# Altium PCB GY-G11.PCBDOC (part 2 of 7)
Units mm, origin at the board's own origin, x right, y up, seen from the top; angles counter-clockwise.
Board outline 170.4 x 114.15 mm, 2 copper layers (Top Layer, Bottom Layer); 364 components, 260 nets, 1285 pads, 753 vias.
Unrouted connection lines stored in the file: 2.
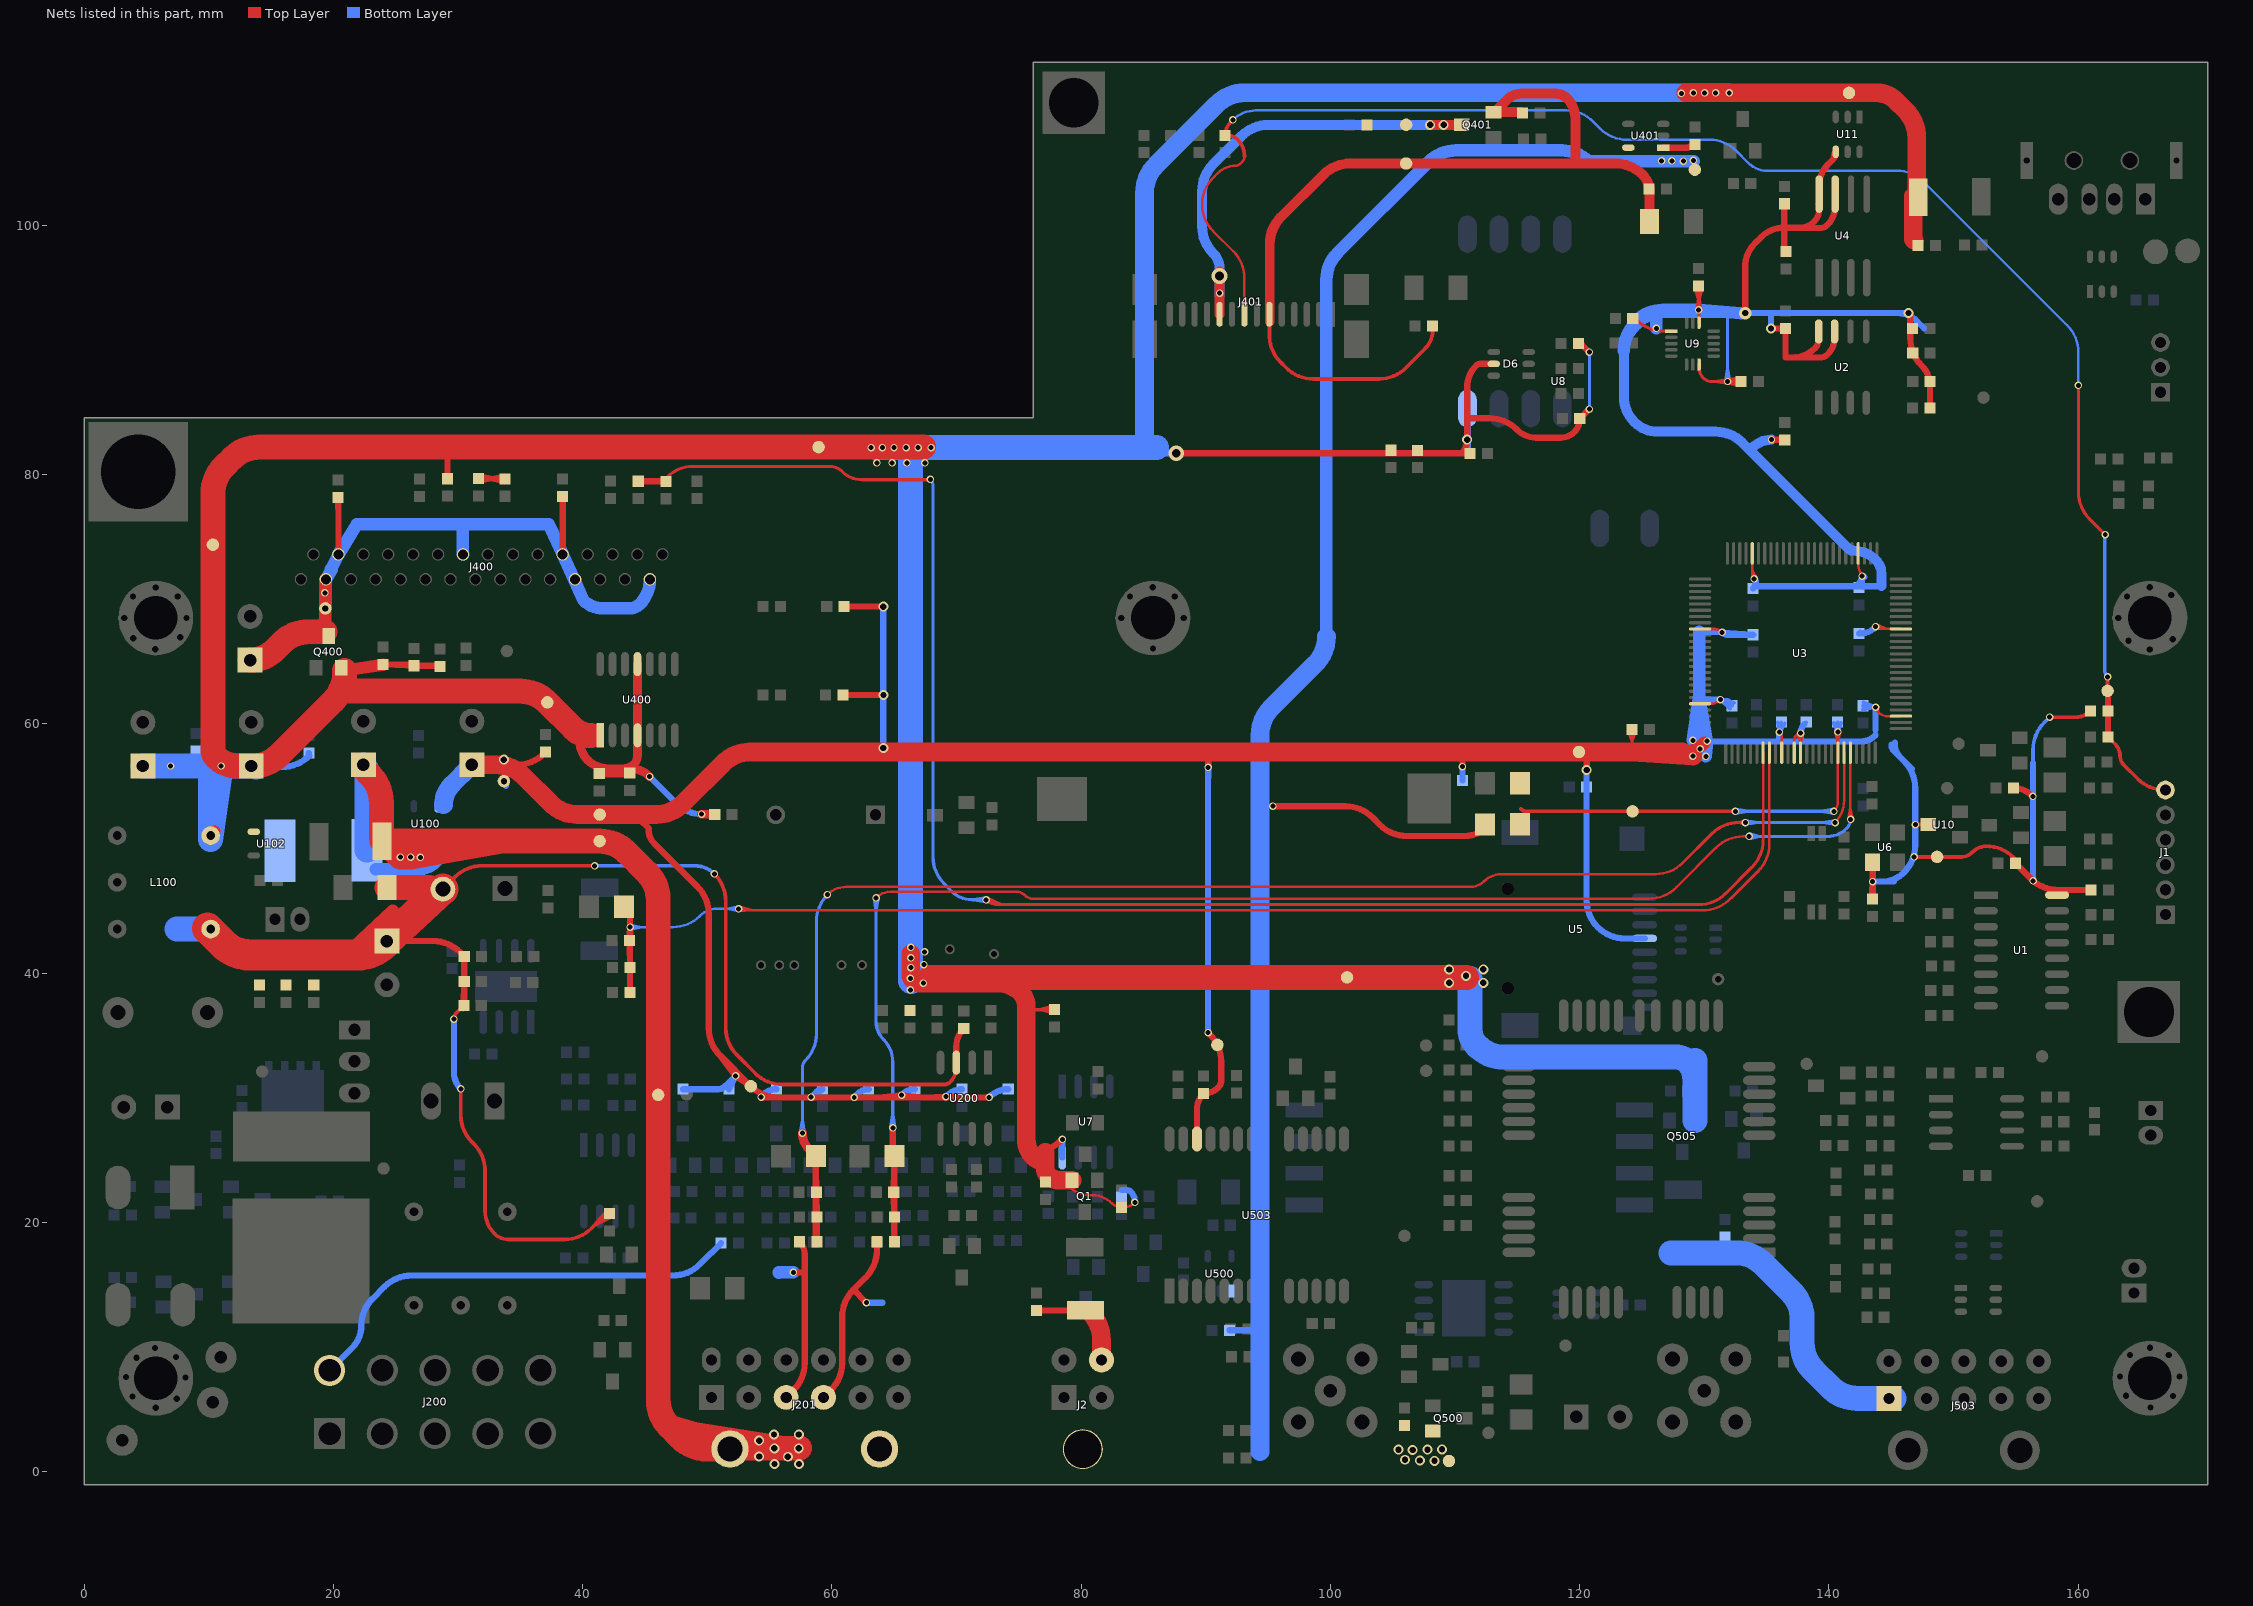
[diagram p2: the nets of this part, all layers, seen from the top]

## Via types
v1: diameter 0.6, hole 0.4, Top Layer to Bottom Layer, 620 vias
v2: diameter 0.8, hole 0.5, Top Layer to Bottom Layer, 121 vias
v3: diameter 1, hole 0.5, Top Layer to Bottom Layer, 10 vias
v4: diameter 1.27, hole 0.711, Top Layer to Bottom Layer, 2 vias

## Nets (pads, with @x,y where several pads share a name; then routed paths per layer and width w, separated by ;. In a path a pad name is that pad's centre, name@x,y a point inside that pad or via, vN(x,y) a via of type N, cw(c..) or ccw(c..) an arc to the next point about the centre after c; other vN are vias at no path point)
3V3: C2.1 C5.1 C7.1 C13.1 C14.1 C15.1 C16.1 C17.1 C18.1 C19.1 C20.1 C21.1 C22.1 C23.1 C24.1 C25.1 C26.1 C114.1 C124.1 C501.1 pad.0@33.68,55.41 pad.1@148.679,49.33 pad.5@41.37,52.73 pad.7@119.94,57.75 pad.9@90.93,34.25 pad.10@53.492,30.928 R1.2 R2.2 R3.1 R6.2 R7.2 R10.2 R13.2 R15.2 R16.2 R33.2 R34.1 R35.1 R200.1 R201.1 R202.1 R203.1 R205.1 R207.1 R208.1 R209.1 U1.16 U2.7 U2.8 U3.10 U3.12 U3.13 U3.28 U3.42 U3.54 U3.71 U3.84 U3.96 U4.7 U4.8 U5.4 U6.4 U9.1 U9.8 U9.14 U10.3 U11.4 U100.5 U503.22 | length 655
  Top Layer w0.2: R7.2@123.857,59.489 124.197,58.501 ; R7.2@124.053,59.536 124.197,58.501 ; 124.18,57.99 ccw(c124.139,58.031) 124.197,58.031 R7.2@124.197,59.546 ; R7.2@124.341,59.536 124.197,58.501 ; R7.2@124.537,59.489 124.197,58.501 ; U3.96@129.656,61.624 130.492,61.624 ccw(c130.492,62.738) v1(131.28,61.95) ; 133.846,72.556 ccw(c134.768,72.556) v1@134.116,71.904 ; U3.71@133.846,73.684 133.846,71.998 ccw(c134.338,71.998) v1(133.99,71.65) ; v1(136.02,59.34) cw(c135.547,58.867) 136.216,58.867 U3.10@136.216,57.694 ; U3.12@137.216,57.694 137.216,58.718 cw(c137.742,58.718) 137.37,59.09 ; v1@137.531,59.241 U3.13@137.716,58.36 ; v1@137.602,59.414 137.37,59.09 ; v1@137.604,59.415 137.406,59.126 ; U3.13@137.716,57.694 137.716,59.226 cw(c137.764,59.226) v1(137.73,59.26) ; v1@137.751,59.061 137.406,59.126 ; v1@137.767,59.063 137.37,59.09 ; v1@137.928,59.235 U3.13@137.716,58.36 ; U3.54@142.346,73.684 142.346,72.852 ccw(c143.692,72.852) v1@142.74,71.9 ; C114.1@143.478,45.958 ccw(c143.393,46.043) C114.1@143.513,46.043 ; v1@143.585,61.214 143.874,61.016 ; v1@143.588,61.211 143.94,60.95 ; v1@143.725,67.601 144.737,67.624 ; v1(143.74,67.8) 144.737,67.624 ; v1@143.794,67.993 144.737,67.624 ; v1@143.934,61.388 143.94,60.95 ; v1@143.939,61.361 143.874,61.016 ; v1@143.971,67.624 U3.42@145.776,67.624 ; U3.28@145.776,60.624 144.728,60.624 cw(c144.728,61.738) 143.94,60.95 ; 137.37,59.09 v1(137.73,59.26) ; 137.37,59.09 137.406,59.126 ; 137.406,59.126 cw(c137.73,58.801) v1(137.73,59.26) ; 137.406,59.126 v1(137.73,59.26) ; U3.13@137.716,58.36 v1(137.73,59.26) ; v1(143.74,61.34) ccw(c144.199,61.34) 143.874,61.016 ; v1(143.74,61.34) 143.874,61.016 ; v1(143.74,61.34) 143.94,60.95 ; 143.874,61.016 143.94,60.95
  Top Layer w0.254: 110.59,57.678 cw(c110.692,57.678) 110.62,57.75 ; C20.1@124.458,92.522 124.557,92.424 ccw(c126.725,94.592) 126.725,91.526 U9.1@127.45,91.526 ; C17.1@129.21,95.087 129.572,93.932 ; v1@129.378,93.248 129.572,94.293 ; v1(129.55,93.23) 129.572,94.293 ; U9.8@129.572,88.951 129.572,88.613 ccw(c130.793,88.613) 129.93,87.75 ccw(c130.588,88.408) 130.588,87.478 C15.1@132.942,87.478 ; U9.14@129.572,92.1 129.572,95.021 ccw(c129.402,95.021) C17.1@129.522,95.142 129.572,93.932 ; U3.84@129.656,67.624 130.735,67.624 cw(c130.735,66.655) v1(131.42,67.34) ; v1@129.723,93.24 129.572,94.293 ; C17.1@129.839,95.113 129.572,93.932 ; v1@131.856,87.305 130.808,87.478 v1@131.856,87.65 ; C15.1@132.845,87.175 v1@131.884,87.65 ; C15.1@132.845,87.78 v1@131.884,87.305 ; C15.1@132.9,87.163 131.735,87.478 C15.1@132.9,87.792 ; C15.1@132.946,87.16 v1@131.884,87.305 ; C15.1@132.946,87.795 v1@131.884,87.65 ; v1@131.884,87.305 C15.1@132.942,87.478 ; v1@131.884,87.305 132.932,87.478 v1@131.884,87.65 ; v1@131.884,87.65 C15.1@132.942,87.478
  Top Layer w0.3: v1(146.84,49.34) ccw(c146.864,49.364) 146.864,49.33 150.634,49.33 ccw(c150.634,50.525) 151.479,49.68 151.521,49.722 cw(c152.65,48.594) 152.65,50.19 cw(c152.65,47.124) 154.818,49.292 cw(c154.479,48.953) 154.958,48.953 C2.1@154.958,48.822 ; v1(146.93,51.93) cw(c146.932,51.928) 146.932,51.931 U10.3@147.963,51.931 ; 147.569,49.31 cw(c147.617,49.262) 147.617,49.33 ; v1(157.71,60.54) 159.776,60.54 ccw(c159.776,62.267) R10.2@160.997,61.046
  Top Layer w0.5: 33.064,56.726 34.737,56.726 ccw(c34.737,59.792) 36.905,57.624 C7.1@37.022,57.742 ; 44.6,52.32 45.33,51.59 ; 45.28,51.54 ccw(c46.922,51.54) 45.761,50.379 49.222,46.918 cw(c47.054,44.75) 50.12,44.75 50.12,35.57 ccw(c53.186,35.57) 51.018,33.402 pad.10@53.492,30.928 ; 51.037,33.383 v1(52.27,31.77) pad.10@53.492,30.928 ; v1@54.32,30.03 v1(72.62,30.03) 70.82,30.03 ; v1(54.32,30.06) 56.121,30.03 ; 55.66,30.03 cw(c55.66,33.096) pad.10@53.492,30.928 ; 56.529,30.03 v1(58.33,30.05) 60.131,30.03 ; 59.99,30.03 v1(61.79,30.04) 63.59,30.03 ; R35.1@60.881,62.33 v2(64.145,62.33) ; R34.1@60.981,69.43 64.073,69.43 cw(c64.073,69.363) v2(64.12,69.41) ; 63.743,30.03 v1(65.59,30.21) 67.436,30.03 ; 67.344,30.03 v1(69.15,30.09) 70.955,30.03 ; U503.22@89.29,26.694 89.29,29.056 cw(c91.108,29.056) C501.1@89.822,30.342 ccw(c89.822,32.006) 90.999,30.829 ccw(c90.417,31.411) 91.24,31.411 91.24,32.91 ccw(c88.174,32.91) 90.342,35.078 v1(90.18,35.24) ; 90.18,57.22 cw(c90.156,57.196) 90.19,57.196 v1(90.19,56.51) ; v1(110.59,56.58) 110.59,57.678 ; 120.55,57.36 cw(c120.526,57.336) 120.56,57.336 v2(120.56,56.3) ; v3(133.28,92.97) 133.28,96.691 cw(c135.909,96.691) 134.05,98.55 134.558,99.058 cw(c136.422,97.193) 136.422,99.83 ; v2(135.36,91.73) 135.943,91.73 cw(c135.943,90.911) C19.1@136.522,91.49 ; v1(135.39,82.81) ccw(c135.421,82.841) 135.421,82.797 R1.2@136.454,82.797 ; 136.422,99.79 139.291,99.79 ccw(c139.291,100.609) 139.87,100.03 ccw(c138.369,101.531) 140.492,101.531 U4.7@140.492,102.514 ; 136.422,99.81 137.627,99.81 ccw(c137.627,101.483) 138.81,100.3 ccw(c137.84,101.27) 139.212,101.27 139.212,103.166 cw(c141.664,103.166) 139.93,104.9 140.268,105.238 ccw(c139.601,105.906) U11.4@140.545,105.906 ccw(c140.822,105.629) U11.4@140.43,105.629 ; C18.1@136.422,101.742 136.422,98.201 ccw(c136.844,98.201) R2.2@136.546,97.903 ; C19.1@136.522,91.742 136.522,89.46 ccw(c136.603,89.46) 136.546,89.403 139.308,89.403 ccw(c139.308,90.212) 139.88,89.64 ccw(c138.502,91.018) 140.451,91.018 U2.7@140.451,91.492 ; 137.076,89.403 ccw(c137.076,91.954) 138.88,90.15 ccw(c138.154,90.876) 139.181,90.876 U2.8@139.181,91.492 ; U4.8@139.174,101.742 cw(c139.174,101.634) U4.8@139.25,101.71 ; C114.1@143.478,45.958 143.513,47.904 ; C114.1@143.513,46.043 U6.4@143.513,48.893 ; v2@146.519,92.97 cw(c143.899,92.73) 146.53,92.73 146.53,90.955 ccw(c149.657,90.955) 147.446,88.744 cw(c145.86,87.158) 148.103,87.158 R16.2@148.103,85.354 ; R15.2@154.803,54.854 cw(c154.803,52.698) 156.327,54.223 v1(156.37,54.18) ; C2.1@155.016,48.765 v1(156.38,47.41) C2.1@154.958,48.822 156.205,47.576 ccw(c158.373,49.744) 158.373,46.678 C5.1@161.042,46.678 159.097,46.678
  Top Layer w1: 128.248,57.75 ccw(c128.248,60.242) v1@130.01,58.48
  Top Layer w1.5: C124.1@31.108,56.726 33.064,56.726 cw(c33.064,53.66) 35.232,55.828 37.432,53.628 ccw(c39.6,55.796) 39.6,52.73 45.88,52.73 ccw(c45.88,55.796) 48.048,53.628 51.272,56.852 cw(c53.44,54.684) 53.44,57.75 128.248,57.75 v1(129.09,57.41) 124.138,57.75
  Bottom Layer w0.2: v1@136.02,59.29 v1(136.02,59.34)
  Bottom Layer w0.254: v1@131.698,87.492 131.87,88.54 v1@132.042,87.492 ; v1(131.87,87.478) 131.87,92.849 cw(c132.041,92.849) 131.92,92.97
  Bottom Layer w0.3: C22.1@131.977,61.296 131.722,61.95 ; C22.1@132.051,61.219 v1(131.28,61.95) ; C22.1@132.321,61.736 v1(131.28,61.95) ; C22.1@132.38,61.707 131.722,61.95 ; C21.1@136.452,60.034 v1(136.02,59.34) ; C21.1@136.454,60.04 v1@136.02,59.29 ; C23.1@138.037,60.001 C23.1@138.178,60.142 ; C26.1@142.154,71.078 v1(142.668,71.87) ; C26.1@142.163,71.098 v1@142.74,71.859 ; C25.1@142.422,67.258 cw(c142.65,67.258) C25.1@142.489,67.419 ; C26.1@142.63,71.02 ccw(c142.364,71.286) C26.1@142.74,71.286 ; C26.1@142.712,70.904 v1@142.74,71.859 ; C26.1@142.715,70.927 v1(142.668,71.87) ; C24.1@142.731,61.164 v1(143.74,61.34) ; C24.1@142.782,61.17 143.454,61.458 ; C24.1@142.782,61.747 143.454,61.458 ; C24.1@142.798,61.743 v1(143.74,61.34) ; 156.38,56.87 156.38,57.94 cw(c159.446,57.94) 157.278,60.108 v1(157.71,60.54) ; v1(131.28,61.95) C22.1@132.222,61.458 ; v1(131.28,61.95) 131.722,61.95 ; 131.722,61.95 cw(c131.722,61.472) 132.06,61.81 132.089,61.781 cw(c131.766,61.458) C22.1@132.222,61.458 ; 131.722,61.95 C22.1@132.222,61.458 ; v1@136.02,59.29 C21.1@136.178,60.142 ; v1@136.02,59.29 135.883,60.145 v1(136.02,59.34) ; v1@136.02,59.29 C21.1@136.02,59.761 ; v1(136.02,59.34) C21.1@136.178,60.142 ; v1(136.02,59.34) C21.1@136.02,59.761 ; C21.1@136.02,59.761 cw(c136.558,59.761) C21.1@136.178,60.142 ; v1(142.668,71.87) C26.1@142.422,70.958 v1@142.74,71.859 ; v1(142.668,71.87) C26.1@142.74,71.286 ; C24.1@142.722,61.458 143.454,61.458 ; C24.1@142.722,61.458 v1(143.74,61.34) ; C24.1@142.722,61.458 v1(143.74,61.34) ; C24.1@142.722,61.458 143.454,61.458 ; C26.1@142.74,71.286 v1@142.74,71.859 ; 143.454,61.458 cw(c143.454,61.054) v1(143.74,61.34)
  Bottom Layer w0.5: pad.0@33.68,55.41 cw(c33.286,55.016) pad.0@33.843,55.016 ; R200.1@48.046,30.694 50.87,30.694 ccw(c50.87,31.476) 51.423,30.923 R201.1@51.47,30.97 ; v1(54.32,30.06) 54.535,30.275 cw(c55.546,29.265) R202.1@55.546,30.694 ; v1(61.79,30.04) 62.089,30.339 cw(c62.946,29.482) R205.1@62.946,30.694 ; v2(64.12,58.08) v2(64.12,69.41) ; v1(65.59,30.21) 65.67,30.29 cw(c66.646,29.313) R207.1@66.646,30.694 ; v1(69.15,30.09) 69.265,30.205 cw(c70.446,29.024) R208.1@70.446,30.694 ; v1(72.62,30.03) 72.675,30.085 cw(c74.146,28.613) R209.1@74.146,30.694 ; v1(90.18,35.24) 90.18,56.486 cw(c90.214,56.486) v1(90.19,56.51) 90.18,54.71 ; v1(110.59,56.58) cw(c110.573,56.563) 110.597,56.563 R6.2@110.597,55.454 ; v2(120.56,56.3) ccw(c120.584,56.276) 120.55,56.276 120.55,45.86 ccw(c123.616,45.86) 121.448,43.692 121.455,43.685 ccw(c123.623,45.853) 123.623,42.787 U5.4@125.213,42.787 ; v1@129.58,58.235 cw(c130.799,56.381) 130.799,58.6 142.575,58.6 ccw(c142.575,60.205) 143.71,59.07 ccw(c143.638,59.142) 143.74,59.142 ; 129.58,61.95 v1(131.28,61.95) ; 129.58,67.39 ccw(c129.628,67.438) 129.628,67.37 ; 131.975,67.283 C14.1@133.922,67.158 ; 131.978,67.15 C14.1@133.922,67.158 ; v3(133.28,92.97) v2(146.385,92.97) ; C13.1@134.05,71.04 144.162,71.04 ccw(c144.162,71.108) 144.21,71.06 ; v1@134.052,71.682 cw(c133.421,71.359) C13.1@133.922,70.858 134.13,71.359 ; v2(135.36,91.73) 135.36,92.92 ; v1@136.02,59.29 136.02,58.648 ; v1(136.02,59.34) 136.02,58.648 ; 136.04,58.6 cw(c136.088,58.648) 136.02,58.648 ; 137.78,58.6 cw(c137.901,58.721) 137.73,58.721 v1(137.73,59.26) cw(c138.778,59.26) C23.1@138.037,60.001 ; C25.1@142.422,67.258 142.509,67.258 ccw(c142.509,68.971) v1@143.72,67.76 ; v1@142.74,71.859 cw(c142.668,71.624) v1@142.842,71.798 ; v1(143.513,47.35) 145.194,47.35 ; 143.74,59.54 v1(143.74,61.34) ; 144.258,47.35 ccw(c144.258,49.842) 146.02,48.08 146.022,48.082 ccw(c143.854,50.25) 146.92,50.25 146.92,54.86 ccw(c143.854,54.86) 146.022,57.028 ; 145.01,58.36 ccw(c145.783,58.36) 145.236,57.814 146.642,56.408 ; 145.29,58.52 145.29,58.34 ccw(c146.69,58.34) 145.7,57.35 ; 145.49,92.97 cw(c145.49,90.749) 147.061,92.319 147.63,91.75 ; 145.951,92.97 cw(c145.951,92.151) v2@146.53,92.73 ; v1(156.38,47.41) 156.38,56.87 ; 156.38,52.38 v1(156.37,54.18) 156.38,55.98 ; R201.1@51.47,30.97 v1(52.27,31.77) ; R201.1@51.47,30.97 v1(52.27,31.77) ; v1(52.27,31.77) R201.1@51.746,30.694 v1(52.27,31.77) ; 58.782,30.502 cw(c59.246,30.037) R203.1@59.246,30.694 ; 58.782,30.502 R203.1@59.246,30.694 ; 58.782,30.502 v1(58.33,30.05) R203.1@59.246,30.694 ; 129.628,67.37 v1(131.42,67.34) ; 129.628,67.37 131.39,67.37 ccw(c131.921,67.901) 131.921,67.15 ; v1(131.42,67.34) 131.921,67.15 ; v1(131.42,67.34) 133.263,67.15 C14.1@133.922,67.158 ; 131.921,67.15 133.902,67.15 ccw(c133.902,67.178) C14.1@133.922,67.158
  Bottom Layer w0.8: v3(133.28,92.97) 126.83,92.97 ccw(c126.83,89.904) 126.16,92.896 ccw(c126.83,89.904) 124.662,92.072 124.439,91.849 ccw(c126.607,89.681) 123.541,89.681 123.541,86.271 ccw(c126.441,86.271) 124.39,84.22 ccw(c126.249,86.079) 126.249,83.45 130.9,83.45 cw(c130.9,80.384) 133.068,82.552 133.655,81.965 141.541,74.079 ccw(c141.973,74.512) 141.973,73.9 cw(c141.973,71.373) 143.76,73.16 cw(c142.674,72.074) 144.21,72.074 144.21,71.06 ; 133.72,82.03 133.871,82.181 cw(c135.39,80.661) v1(135.39,82.81)
  Bottom Layer w1: C124.1@30.525,56.485 cw(c31.108,55.902) C124.1@31.108,56.726 ; 123.541,89.95 cw(c126.607,89.95) 124.439,92.118 124.652,92.332 cw(c126.82,90.164) 126.82,93.23 ; 124.484,92.314 cw(c126.695,90.103) 126.695,93.23 v1(129.55,93.23) v3@132.944,92.97 ; 126.15,93.06 cw(c126.126,93.036) 126.16,93.036 v1(126.16,91.74) ; 129.58,62.258 v1(129.08,58.69) ; 129.58,62.317 v1(130.22,58.63) ; 129.58,66.84 ccw(c127.792,66.84) 129.58,66.86 ; 129.58,67.39 v1@129.58,58.235 ; v1(129.08,58.69) v1(130.22,58.63) ; v1(129.08,58.69) v1(130.13,57.39) ; v1(129.08,58.69) v1@129.58,58.235 ; v1(129.08,58.69) 129.58,61.344 ; v1(129.08,58.69) v1(129.67,58) ; v1@129.58,58.235 v1(130.22,58.63) ; v1@129.58,58.235 v1(130.22,58.63) ; 129.58,61.344 v1(130.22,58.63) ; 129.58,61.344 v1(129.67,58) ; v1(129.67,58) v1(130.22,58.63) ; v1(129.67,58) v1(130.13,57.39) ; v1(129.67,58) v1(130.13,57.39) ; v1(130.13,57.39) v1(130.22,58.63) ; v1(130.13,57.39) 129.598,60.683 v1(130.22,58.63)
  Bottom Layer w1.5: 28.83,53.51 cw(c31.057,53.51) 29.482,55.085 ; 29.469,55.099 C124.1@30.985,56.615
  other v2: 33.67,57.13
3V3-RTC: C3.1 D3.2 D10.2 pad.17 U3.19 | length 41.7
  Top Layer w0.2: v1(140.4,52.99) ccw(c139.638,53.752) 140.716,53.752 140.716,59.36 cw(c140.73,59.36) v1(140.72,59.37) U3.19@140.716,58.47 ; v1@140.521,59.349 U3.19@140.716,58.47 ; v1@140.919,59.347 U3.19@140.716,58.47
  Top Layer w0.3: D3.2@115.18,51.63 ccw(c115.147,51.663) D3.2@115.194,51.663 ; 115.294,53.18 ccw(c115.753,53.639) 115.753,52.99 v1(132.49,52.99)
  Bottom Layer w0.254: v1(132.49,52.99) v1(140.4,52.99) ; v1@132.504,52.818 133.552,52.99 v1@132.504,53.162 ; v1@140.386,52.818 139.338,52.99 v1@140.386,53.162
  Bottom Layer w0.3: C3.1@140.392,60.07 v1(140.72,59.37) ; C3.1@140.969,60.102 v1(140.72,59.37) ; v1(140.72,59.37) C3.1@140.678,60.142 cw(c140.575,60.039) 140.72,60.039 v1(140.72,59.37)
3V3LCM: C407.2 C417.1 J401.6 pad.8@106.07,104.97 Q401.2 R402.1 R404.1 U401.5 | length 76.7
  Top Layer w0.3: J401.6@95.101,92.87 95.101,91.2 ccw(c98.167,91.2) 95.13,90.777 ccw(c98.167,91.2) 95.999,89.032 96.453,88.578 ccw(c98.621,90.746) 98.621,87.68 103.891,87.68 ccw(c103.891,90.746) 106.059,88.578 107.601,90.12 ccw(c106.166,91.555) 108.195,91.555 R402.1@108.195,91.916
  Top Layer w0.8: J401.6@95.131,92.31 cw(c95.132,92.312) 95.13,92.312 95.13,98.498 cw(c98.196,98.498) 96.028,100.666 99.434,104.072 cw(c101.602,101.904) 101.602,104.97 122.855,104.97 cw(c122.855,101.843) 125.066,104.054 cw(c123.734,102.722) 125.618,102.722 C417.1@125.618,100.333 ; R404.1@115.415,109.018 ccw(c115.239,108.842) 115.239,109.091 Q401.2@113.074,109.091 ccw(c113.074,109.324) 113.238,109.16 114.179,110.1 cw(c115.314,108.965) 115.314,110.57 118.096,110.57 cw(c118.096,109.307) 118.989,110.2 cw(c117.395,108.607) 119.649,108.607 119.649,105.091 cw(c119.478,105.091) 119.599,104.97
3V_BL: C406.2 J401.10 pad.9@106.07,108.08 Q401.3 | length 38.4
  Top Layer w0.8: v4@91.091,96.32 cw(c91.066,96.296) 91.101,96.296 J401.10@91.101,92.87 ; v2(108,108.075) Q401.3@110.534,108.075
  Bottom Layer w0.8: v1@91.101,94.33 91.101,96.551 ccw(c89.387,96.551) 90.599,97.762 cw(c92.767,99.93) 89.701,99.93 89.701,102.75 cw(c92.767,102.75) 90.599,104.918 92.842,107.162 cw(c95.01,104.994) 95.01,108.06 110.619,108.06
  other v1: 91.101,94.56
  other v2: 109.09,108.075
  other v4: 91.101,95.95
4V: C118.1 D3.1 D101.2 D105.2 J2.0 J201.0 pad.4@41.364,50.596 pad.4@46.06,30.24 pad.10@129.24,104.47 pad.11 Q500.2 R403.2 R507.1 R508.2 U100.1 U100.3 U401.1 U500.1 | length 304.2
  Top Layer w0.5: v1(95.389,53.4) 101.21,53.39 cw(c101.21,50.324) 103.378,52.492 103.962,51.908 ccw(c106.13,54.076) 106.13,51.01 110.797,51.01 ccw(c110.797,53.263) D3.1@112.39,51.67 ; U401.1@126.706,106.243 128.642,106.243 ; 128.642,106.243 ccw(c128.642,107.109) R403.2@129.254,106.497 128.642,106.243
  Top Layer w2: C118.1@22.39,56.45 22.942,55.898 cw(c20.774,53.73) 23.84,53.73 D101.2@23.84,50.87 ; 31.859,50.311 v1(25.37,49.32) ; 32.658,50.596 v1(25.37,49.32) ; 33.486,50.596 v1(26.2,49.32) ; J201.0@51.82,1.82 50.01,1.82 cw(c50.01,4.886) 49.406,1.88 cw(c50.01,4.886) 47.842,2.718 ; 56.082,1.88 48.98,2.98 ; v2@57.41,1.91 cw(c57.338,1.982) v2(57.338,1.88) 49.27,1.88 ; D101.2@23.901,50.596 v1(25.37,49.32) ; D101.2@23.901,50.596 v1(25.37,49.32) ; D101.2@23.901,50.596 v1(26.2,49.32) ; D101.2@23.901,50.596 pad.4@41.364,50.596 cw(c41.364,47.53) 43.532,49.698 45.162,48.068 cw(c42.994,45.9) 46.06,45.9 46.06,5.77 ccw(c49.126,5.77) 46.958,3.602 ; v1(25.37,49.32) v1(26.2,49.32) ; v1(25.37,49.32) v1(26.2,49.32) ; 46.958,3.602 48.98,2.98 ; 46.958,3.602 47.775,2.785 ; 47.775,2.785 48.98,2.98 ; 47.775,2.785 48.98,2.98 ; 47.775,2.785 47.842,2.718 ; 47.842,2.718 48.98,2.98 ; 48.98,2.98 49.27,1.88 ; 48.98,2.98 49.27,1.88
  Bottom Layer w0.5: R508.2@91.903,11.346 93.962,11.346 cw(c93.962,11.292) 94,11.33
  Bottom Layer w1: D105.2@23.39,48.33 26.761,48.33 ccw(c26.761,50.379) 28.21,48.93 ccw(c27.268,49.872) 28.6,49.872 U100.1@28.6,50.59 ; 26.19,50.59 cw(c26.166,50.566) 26.2,50.566 26.2,48.33 ; 99.68,66.99 99.68,95.64 cw(c102.746,95.64) 100.578,97.808 107.874,105.104 cw(c110.085,102.893) 110.085,106.02 118.566,106.02 cw(c118.566,103.016) 120.69,105.14 v1@129.14,105.14 ; 26.2,48.33 v1(26.2,49.32) v1(26.97,49.29) 26.2,48.33
  Bottom Layer w1.5: 94.35,1.59 94.35,59.12 cw(c97.416,59.12) 95.248,61.288 98.782,64.822 ccw(c96.614,66.99) 99.68,66.99
  Bottom Layer w2: C118.1@22.408,56.726 cw(c21.696,56.015) 22.702,56.015 D105.2@22.702,49.865
  other v1: 126.57,105.19 127.4,105.18 128.31,105.17 129.12,105.22
  other v2: 55.4,0.61 57.36,0.61 108.34,0.87 107.17,0.9 105.99,0.96 56.46,1.2 54.16,1.23 106.6,1.75 105.45,1.77 107.79,1.77 108.95,1.8 55.38,1.88 54.16,2.49 55.36,2.98 57.34,2.99
5VA: C101.2 C105.1 C106.1 C116.2 C117.1 C121.1 C123.2 L100.1 L102.2 R101.2 R106.2 R210.2 U200.3 | length 144.6
  Top Layer w0.3: L102.2@28.778,46.742 29.758,47.722 cw(c31.926,45.554) 31.926,48.62 v1(40.95,48.62) 39.75,48.62 ; v1(29.669,36.31) cw(c30.441,36.31) 29.895,36.856 C123.2@30.461,37.422 ; v1(30.219,30.71) 30.219,28.62 ccw(c33.285,28.62) 31.117,26.452 31.272,26.297 cw(c29.104,24.129) 32.17,24.129 32.17,20.911 ccw(c34.731,20.911) 32.92,19.1 ccw(c34.031,20.211) 34.031,18.64 38.55,18.64 ccw(c38.55,21.706) 40.718,19.538 41.697,20.517 ; R210.2@41.943,20.917 40.964,19.784 ; R210.2@41.956,20.928 41.697,20.517 ; R210.2@42.171,20.41 41.697,20.517 ; R210.2@42.303,20.454 40.964,19.784 ; v1(50.56,47.97) 50.582,47.948 cw(c48.414,45.78) 51.48,45.78 51.48,35.6 ccw(c54.546,35.6) 52.378,33.432 53.842,31.968 ccw(c56.01,34.136) 56.01,31.07 69.021,31.07 ccw(c69.021,31.719) 69.48,31.26 ccw(c68.275,32.465) 69.979,32.465 U200.3@69.979,32.823 ccw(c70.074,32.728) 69.94,32.728 U200.3@69.94,32.57 ; 40.964,19.784 R210.2@42.146,20.703 ; 41.697,20.517 cw(c42.146,20.068) R210.2@42.146,20.703 ; 41.697,20.517 R210.2@42.146,20.703
  Top Layer w0.5: C121.1@24.292,42.574 28.006,42.574 cw(c28.006,39.508) 30.174,41.676 30.3,41.55 cw(c29.824,41.074) R101.2@30.497,41.074 ; C123.2@30.37,37.17 ccw(c30.063,37.477) 30.497,37.477 R101.2@30.497,41.346 ; R106.2@30.497,39.346 C123.2@30.461,37.422 R106.2@30.497,39.368 ; U200.3@69.979,32.823 69.979,34.117 cw(c72.022,34.117) C116.2@70.578,35.561
  Top Layer w1: 21.69,42.15 24.75,45.03
  Top Layer w2: C117.1@24.286,46.878 27.489,46.878 cw(c27.489,45.452) L102.2@28.497,46.461
  Top Layer w2.5: L100.1@9.89,43.61 11.132,42.368 ; 11.132,42.368 ccw(c13.3,44.536) 13.3,41.47 21.919,41.47 ccw(c21.919,44.536) C121.1@24.087,42.368 ; C121.1@24.292,42.574 L102.2@28.778,46.742
  Bottom Layer w0.3: v1(40.95,48.62) 48.991,48.62 cw(c48.991,46.401) v1(50.56,47.97)
  Bottom Layer w0.5: v1(29.669,36.31) 29.669,32.038 ccw(c31.547,32.038) v1(30.219,30.71)
  Bottom Layer w2: 7.44,43.55 10.133,43.55 cw(c10.133,43.528) L100.1@10.148,43.544
5VB: C8.1 C9.1 C31.1 C107.1 C108.1 C122.1 C402.2 C409.2 C410.2 C411.2 C412.2 C418.1 D6.5 D105.1 F2.1 L100.3 pad.3@58.93,82.21 pad.6@101.33,39.67 pad.12 pad.14@141.61,110.64 pad.15 Q1.2 Q400.2 Q505.2 R8.2 R9.2 R11.1 R12.2 R14.2 R29.1 R32.1 R204.1 R401.1 R407.1 R523.1 U7.8 U8.1 U102.4 U400.1 U400.4 U400.11 | length 540.7
  Top Layer w0.2: Q1.2@78.9,22.96 ccw(c80.783,24.843) 80.783,22.18 80.894,22.18 cw(c80.894,19.945) 82.475,21.525 ccw(c83.246,22.297) R11.1@83.246,21.206 83.325,21.206 ccw(c83.325,22.585) v1(84.3,21.61)
  Top Layer w0.254: 76.18,37.07 cw(c76.189,37.061) 76.189,37.074 R32.1@77.864,37.074 ; R32.1@77.822,36.759 76.657,37.074 R32.1@77.822,37.388
  Top Layer w0.5: 25.922,64.696 C412.2@23.978,64.761 ; C409.2@26.595,64.67 R401.1@28.542,64.626 ccw(c28.435,64.519) 28.435,64.67 C409.2@26.474,64.67 ; 29.15,81.55 cw(c29.13,81.53) 29.158,81.53 R407.1@29.158,79.674 ; 77.122,25.942 ccw(c77.122,27.34) 78.111,26.351 ; v4(87.63,81.718) ccw(c87.635,81.723) 87.635,81.716 R12.2@111.198,81.716 ; 110.518,81.717 ccw(c109.425,82.81) v2(110.971,82.81) 110.971,86.999 cw(c113.461,86.999) 111.7,88.76 cw(c112.028,88.432) 112.028,88.896 D6.5@113.106,88.896 ; 110.971,84.52 112.781,84.52 cw(c112.781,81.454) 114.949,83.622 ccw(c116.523,85.196) 116.523,82.97 118.484,82.97 ccw(c118.484,84.507) 119.251,83.175 ccw(c118.484,84.507) 119.571,83.42 ccw(c118.525,84.466) 120.004,84.466 R9.2@120.004,84.524 ccw(c120.004,84.6) 120.057,84.546 v1(120.781,85.27) ; R8.2@119.904,90.524 cw(c119.904,90.083) 120.216,90.395 v1(120.781,89.83) ; C412.2@23.978,64.761 24.517,64.761 C409.2@26.474,64.67 ; C412.2@23.978,64.761 26.253,64.761 cw(c26.253,64.45) C409.2@26.474,64.67 ; 78.111,26.351 v1(78.49,26.67) ccw(c78.49,26.525) 78.388,26.628 78.111,26.351
  Top Layer w0.7: 39.78,58.91 39.78,58.583 ccw(c41.863,58.583) 40.39,57.11 ccw(c42.08,58.8) 42.08,56.41 ; 43.241,56.41 ccw(c43.241,57.639) 44.11,56.77 ccw(c43.423,57.457) 44.394,57.457 U400.11@44.394,64.808 ; v1(45.38,55.77) ccw(c43.835,54.225) C108.1@43.835,56.41 ; C402.2@41.326,56.03 C108.1@43.778,56.058 42.08,56.41 ; C402.2@41.326,56.03 42.08,56.41 ; C402.2@41.326,56.03 C108.1@43.835,56.41 ; 42.08,56.41 C108.1@43.835,56.41 ; v1(49.54,52.76) ccw(c49.574,52.794) v1@49.574,52.746 ; v1(49.54,52.76) R14.2@50.597,52.746 ; v1(49.54,52.76) R14.2@50.597,52.746 ; v1@49.574,52.746 R14.2@50.597,52.746 ; v1@49.574,52.746 R14.2@50.597,52.746
  Top Layer w1: L100.3@10.42,51.34 cw(c10.44,51.32) L100.3@10.44,51.348 ; Q400.2@20.89,64.29 C412.2@23.978,64.761
  Top Layer w1.5: 12.317,56.626 C122.1@13.408,56.626 ; 66.33,41.57 66.33,39.913 ccw(c67.013,39.913) 66.53,39.43 ccw(c67.061,39.961) 67.061,39.21 73.358,39.21 cw(c73.358,36.718) 75.12,38.48 cw(c73.961,37.321) 75.6,37.321 75.6,26.632 ccw(c77.512,26.632) 76.16,25.28 ccw(c76.933,26.053) 76.933,24.96 77.11,24.96 ; 77.11,25.62 77.11,24.354 ccw(c77.964,24.354) 77.36,23.75 ccw(c78.241,24.631) 78.241,23.385 Q1.2@79.269,23.385 ; 128.5,110.64 143.849,110.64 cw(c143.849,108.489) 145.37,110.01 146.142,109.238 cw(c143.974,107.07) 147.04,107.07 F2.1@147.04,102.06 ; F2.1@146.76,102.35 146.76,98.975 ccw(c146.965,98.975) 146.82,98.83
  Top Layer w2: 12.317,56.626 cw(c12.317,59.097) 10.57,57.35 cw(c11.149,57.929) 10.33,57.929 10.33,78.5 cw(c13.396,78.5) 11.228,80.668 11.872,81.312 cw(c14.04,79.144) 14.04,82.21 67.36,82.21 ; C122.1@13.408,56.626 13.496,56.626 ccw(c13.496,59.692) 15.664,57.524 19.992,61.852 ccw(c17.824,64.02) 20.557,62.63 ccw(c17.824,64.02) 20.89,64.02 Q400.2@20.89,64.29 ; 20.52,62.63 34.99,62.63 cw(c34.99,59.564) pad.12@37.158,61.732 39.243,59.647 ccw(c40.66,61.064) 40.66,59.06 ; 67.89,39.67 v2@110.93,39.66
  Bottom Layer w0.254: v1(120.781,85.27) v1(120.781,89.83)
  Bottom Layer w0.5: C122.1@13.78,56.55 15.9,56.55 ccw(c15.9,59.616) 18.068,57.448 18.07,57.45 cw(c18.185,57.565) 18.022,57.565 C410.2@18.022,57.661 ; v1(45.38,55.77) 47.577,53.573 ccw(c49.54,55.536) v1(49.54,52.76) ; 83.246,22.594 83.642,22.594 cw(c83.642,22.102) 83.99,22.45 cw(c83.242,21.702) 84.3,21.702 v1(84.3,21.61) ; 86.17,81.718 v4(87.63,81.718) ; U8.1@110.99,85.306 U8.1@110.99,85.298 111.018,82.811 111.03,81.67 ; U7.8@78.481,25.208 v1(78.49,26.67) ccw(c78.512,26.648) 78.481,26.648 U7.8@78.481,25.208
  Bottom Layer w1.5: 85.11,82.18 cw(c85.182,82.252) 85.08,82.252 85.08,102.625 cw(c88.207,102.625) 85.996,104.836 90.884,109.724 cw(c93.095,107.513) 93.095,110.64 v1(132,110.64)
  Bottom Layer w2: C122.1@13.78,56.55 ccw(c13.596,56.366) 13.596,56.626 C418.1@4.708,56.626 ; 63.49,82.18 86.03,82.18 ; 66.31,81.33 66.31,39.402 ccw(c66.412,39.402) v1@66.34,39.33 ; v2@111.19,39.57 111.19,35.518 ccw(c113.068,35.518) 111.74,34.19 111.772,34.158 ccw(c113.94,36.326) 113.94,33.26 127.843,33.26 cw(c127.843,32.133) 128.64,32.93 cw(c127.193,31.483) 129.239,31.483 ; Q505.2@129.239,28.194 129.25,32.98 ; C418.1@4.708,56.626 v1(6.93,56.626) C418.1@4.708,56.626 ; C418.1@4.708,56.626 v1(10.99,56.626) ; v1(10.99,56.626) 10.14,50.72 10.14,56.626 v1(10.99,56.626)
  other v1: 66.3,38.67 67.34,39.21 66.3,39.58 66.33,40.45 67.38,40.69 66.33,41.23 67.43,41.71 66.33,42.08 63.61,80.94 64.82,80.94 66.01,80.94 67.45,80.94 63.14,82.18 64.04,82.18 64.98,82.18 65.95,82.18 66.91,82.18 67.96,82.17 128.15,110.59 129.12,110.64 130.03,110.64 130.91,110.64
  other v2: 109.53,39.23 112.27,39.23 110.87,39.79 109.53,40.3 112.27,40.31
5VCAMERA: C10.1 F1.1 J2.4 | length 8.3
  Top Layer w0.5: C10.1@76.422,12.942 80.317,12.942 ccw(c80.317,12.986) F1.1@80.349,12.955
  Top Layer w1: F1.1@80.349,12.955 cw(c80.349,12.505) 80.667,12.823 80.711,12.779 cw(c78.543,10.611) F1.1@80.729,12.761
  Top Layer w1.5: F1.1@80.667,12.823 80.729,12.761 cw(c78.561,10.593) 81.627,10.593 J2.4@81.627,9.164
5VEXT: C524.1 F500.1 J503.1 | length 24.8
  Bottom Layer w2: F500.1@127.31,17.54 132.561,17.559 cw(c132.561,14.493) 134.729,16.661 136.952,14.438 cw(c134.784,12.27) 137.85,12.27 137.85,10.31 ccw(c140.916,10.31) 138.748,8.142 140.102,6.788 ccw(c142.27,8.956) 142.27,5.89 J503.1@145.21,5.89
5VP: C400.1 C401.2 C403.2 J400.2 J400.8 J400.9 J400.17 J400.27 J400.28 pad.0@19.35,69.27 Q400.3 | length 69.4
  Top Layer w0.5: J400.27@20.4,73.6 20.4,78.106 ccw(c20.31,78.106) C401.2@20.374,78.17 20.4,76.225 ; J400.9@38.4,73.6 38.4,78.207 ccw(c38.323,78.207) C403.2@38.378,78.261 38.4,76.316
  Top Layer w1: Q400.3@19.31,67.4 19.39,70.24 19.4,71.6 Q400.3@19.31,67.4
  Top Layer w2: C400.1@13.308,65.126 ccw(c13.308,67.947) 15.303,65.953 15.852,66.502 cw(c18.02,64.334) 18.02,67.4 Q400.3@19.31,67.4
  Bottom Layer w1: 19.802,72.404 20.4,73.6 21.88,76.01 37.28,76.01 37.67,75.2 38.4,73.6 39.311,71.56 40.03,69.95 ccw(c41.672,71.592) 41.672,69.27 43.735,69.27 ccw(c43.735,70.464) 44.58,69.62 ccw(c42.6,71.6) J400.2@45.4,71.6 ; 19.85,72.38 J400.28@19.4,71.6 ; 30.39,76.01 30.39,73.624 ccw(c30.424,73.624) J400.17@30.4,73.6 ; J400.28@19.4,71.6 19.39,70.24 pad.0@19.35,69.27 J400.28@19.4,71.6
  other v1: 19.32,70.51
ACCIN: J200.2 R214.1 | length 38.8
  Bottom Layer w0.5: J200.2@19.57,7.96 J200.2@19.57,8.132 ; J200.2@19.688,8.132 21.506,9.95 ccw(c19.736,11.72) 22.239,11.72 cw(c25.305,11.72) 23.137,13.888 24.091,14.842 cw(c26.259,12.674) 26.259,15.74 47.23,15.74 ccw(c47.23,18.806) 49.398,16.638 R214.1@51.106,18.346 49.601,16.841
ADC04: C201.1 D202.2 R215.2 R226.2 U3.21 | length 136.8
  Top Layer w0.2: v1(63.54,46.05) cw(c64.699,44.891) 64.699,46.53 74.8,46.53 cw(c74.8,45.54) 75.5,46.24 ccw(c76.128,46.868) 76.128,45.98 125.58,45.98 ccw(c125.58,49.046) 127.748,46.878 130.952,50.082 cw(c133.12,47.914) 133.12,50.98 v1@133.36,50.98 ; v1@141.531,52.369 141.716,53.25 ; U3.21@141.716,57.694 141.716,52.384 ccw(c141.764,52.384) v1(141.73,52.35) 141.716,53.25 ; v1@141.928,52.375 141.716,53.25
  Top Layer w0.5: v1(64.88,27.59) 64.88,25.634 ccw(c65.308,25.634) D202.2@65.005,25.332 65.005,18.46 cw(c64.997,18.46) R215.2@65.003,18.454 R226.2@65.005,20.399 ; C201.1@64.959,22.398 R226.2@65.003,20.454 ; R215.2@65.003,18.51 R226.2@65.003,20.454 ; R215.2@65.005,18.51 R226.2@65.003,20.454 ; R226.2@65.005,20.476 C201.1@64.958,22.422 65.005,24.369 ; C201.1@65.005,22.399 R226.2@65.003,20.454
  Bottom Layer w0.254: v1@63.368,46.036 63.54,44.988 v1@63.712,46.036 ; v1(63.54,46.05) 63.54,36.133 ccw(c65.623,36.133) 64.15,34.66 cw(c62.388,32.898) 64.88,32.898 v1(64.88,27.59) ; v1@64.708,27.604 64.88,28.652 v1@65.052,27.604 ; v1@133.64,51.19 134.422,50.98 133.777,50.81 133.36,50.98 139.891,50.98 ccw(c139.891,53.151) 141.426,51.616 ccw(c140.692,52.35) v1(141.73,52.35)
  other v1: 133.6,50.98
ADC05: C202.1 D203.2 R217.2 R227.2 U3.20 | length 139.5
  Top Layer w0.2: v1(59.63,46.3) cw(c61.151,44.779) 61.151,46.93 111.258,46.93 ccw(c111.258,48.432) 112.32,47.37 cw(c113.72,45.97) 113.72,47.95 126.09,47.95 ccw(c126.09,51.016) 128.258,48.848 129.427,50.017 ; v1@133.268,51.893 132.68,52.09 v1@133.268,52.287 ; v1(140.49,52.09) ccw(c138.738,53.842) 141.216,53.842 U3.20@141.216,57.694
  Top Layer w0.254: 129.427,50.017 130.602,51.192 cw(c132.77,49.024) 132.77,52.09 v1(133.3,52.09)
  Top Layer w0.5: R227.2@58.705,20.418 R217.2@58.803,18.454 cw(c59.038,18.69) R217.2@58.705,18.69 ; R227.2@58.705,20.476 C202.1@58.758,22.422 58.705,24.369 ; C202.1@58.705,22.407 R227.2@58.803,20.454 ; D203.2@58.705,25.332 R217.2@58.705,18.69 ; C202.1@58.758,22.407 R227.2@58.803,20.454 ; R217.2@58.801,18.5 R227.2@58.803,20.454 ; R217.2@58.705,18.69 R227.2@58.803,20.454
  Top Layer w0.7: v1(57.63,27.17) ccw(c59.472,27.17) 58.17,25.867 D203.2@58.705,25.332
  Bottom Layer w0.254: v1@57.458,27.184 57.63,28.232 v1@57.802,27.184 ; v1(57.63,27.17) 57.63,32.388 cw(c58.552,32.388) 57.9,33.04 ccw(c55.848,35.092) 58.75,35.092 58.75,44.14 cw(c61.816,44.14) v1@59.648,46.308 ; v1(133.3,52.09) v1(140.49,52.09) 139.428,52.09 ; v1@133.314,51.918 134.362,52.09 v1@133.314,52.262 ; v1@140.476,51.918 139.428,52.09 ; v1@140.476,52.262 139.428,52.09
ADCIN0: J201.7 R215.1 | length 16.6
  Top Layer w0.5: J201.7@59.327,5.964 59.922,6.559 ccw(c57.754,8.727) 60.82,8.727 60.82,12.43 cw(c63.886,12.43) 61.718,14.598 ; v1(62.77,13.56) 61.742,14.588 ccw(c61.718,14.564) 61.718,14.598 ; R215.1@63.606,18.454 63.606,17.756 cw(c60.54,17.756) 62.708,15.588 61.718,14.598
  Bottom Layer w0.5: v1(62.77,13.56) 64.06,13.56
ADCIN1: J201.5 R217.1 | length 15.2
  Top Layer w0.5: J201.5@56.327,5.964 56.912,6.549 ccw(c54.744,8.717) 57.81,8.717 57.81,17.479 ccw(c56.43,17.479) R217.1@57.406,18.454 ; v1(56.9,15.99) 57.81,15.99
  Bottom Layer w1: 55.72,15.97 cw(c55.768,15.922) 55.768,15.99 v1(56.9,15.99)
ADCKEY: J1.6 J401.8 pad.2@162.359,62.66 R10.1 R19.1 R413.1 | length 134.4
  Top Layer w0.2: J401.8@93.101,92.87 93.101,95.758 ccw(c90.035,95.758) 92.203,97.926 90.598,99.53 cw(c92.766,101.698) 89.7,101.698 cw(c92.694,101.698) 90.577,103.815 90.955,104.193 cw(c92.42,102.728) 92.42,104.8 ccw(c92.42,105.283) 92.761,104.941 92.895,105.075 ccw(c92.397,105.572) 93.101,105.572
  Top Layer w0.254: v1(160.02,87.17) 160.02,78.635 ccw(c163.147,78.635) 160.936,76.424 v1(162.17,75.19)
  Top Layer w0.3: v1(92.179,108.47) 91.984,108.275 ccw(c93.026,107.234) R413.1@91.553,107.234 91.705,107.234 cw(c91.705,106.026) 92.559,106.88 cw(c91.251,105.572) 93.101,105.572 ; 162.359,61.93 v1(162.359,63.78) ; R19.1@162.394,58.946 162.976,58.364 cw(c162.052,57.44) 163.359,57.44 ccw(c164.397,57.44) 163.663,56.706 164.771,55.598 ccw(c166.939,57.766) 166.939,54.7 J1.6@167,54.7
  Top Layer w0.5: R19.1@162.394,58.946 162.394,59.64 pad.2@162.394,62.269
  Bottom Layer w0.2: v1(92.179,108.47) cw(c94.014,106.635) 94.014,109.23 118.909,109.23 cw(c118.909,106.164) 121.077,108.332 121.631,107.778 ccw(c123.799,109.946) 123.799,106.88 130.399,106.88 cw(c130.399,103.814) 132.567,105.982 133.521,105.028 ccw(c135.061,106.568) 135.061,104.39 145.438,104.39 cw(c145.438,101.324) 147.606,103.492 159.122,91.976 cw(c156.954,89.808) 160.02,89.808 v1(160.02,87.17)
  Bottom Layer w0.3: v1@162.129,75.194 162.129,64.335 ccw(c162.914,64.335) v1(162.359,63.78)
ADCMAINPWR: C200.1 D201.2 R213.2 R224.2 U3.8 | length 132.6
  Top Layer w0.2: v1@52.532,44.971 53.62,45.04 ; v1@52.532,45.369 53.62,45.04 ; 132.227,46.068 134.318,48.159 ccw(c132.15,50.327) 135.216,50.327 U3.8@135.216,57.694 ; 135.216,50.377 cw(c132.15,50.377) 134.318,48.209 132.047,45.938 cw(c129.879,48.106) 131.763,45.687 cw(c129.879,48.106) 129.879,45.04 52.824,45.04 cw(c52.824,45.484) v1(52.51,45.17) 53.62,45.04
  Top Layer w0.5: D201.2@43.305,45.332 cw(c42.104,44.13) 43.803,44.13 ; C200.1@43.763,42.398 R224.2@43.803,40.454 R213.2@43.803,38.51 ; R213.2@43.803,38.454 43.803,44.13 ; R224.2@43.803,40.676 C200.1@43.758,42.622 ; C200.1@43.758,42.622 43.803,44.13 ; C200.1@43.758,42.622 43.803,41.9 v1(43.81,43.7) ; C200.1@43.758,42.622 v1(43.81,43.7) ; 43.803,44.13 v1(43.81,43.7)
  Bottom Layer w0.2: v1(43.81,43.7) 47.24,43.7 ccw(c47.24,46.766) 49.408,44.598 49.42,44.61 cw(c50.772,43.258) 50.772,45.17 v1(52.51,45.17) ; v1@43.832,43.501 44.71,43.7 v1@43.832,43.899 ; v1@52.488,44.971 51.61,45.17 v1@52.488,45.369
ADCPAPER: C405.1 R409.1 U3.7 | length 142.4
  Top Layer w0.2: v1(72.38,45.89) ccw(c73.056,46.566) v1@72.382,45.888 ; 134.716,50.67 U3.7@134.716,57.694
  Top Layer w0.254: C405.1@46.674,79.467 cw(c47.196,79.467) 46.827,79.837 cw(c48.814,77.849) 48.814,80.66 59.844,80.66 cw(c59.844,79.294) 60.81,80.26 ccw(c62.428,81.878) 62.428,79.59 67.828,79.59 ccw(c67.828,79.692) v1(67.9,79.62) ; v1(72.38,45.89) ccw(c73.322,46.832) 72.382,45.888 ccw(c73.322,46.832) 73.322,45.5 129.559,45.5 ccw(c129.559,48.566) 131.727,46.398 133.818,48.489 ccw(c131.65,50.657) 134.716,50.657 134.716,50.67 ; v1@72.394,45.718 73.56,45.5 v1@72.394,46.062
  Top Layer w0.5: R409.1@44.729,79.474 C405.1@46.674,79.467 ccw(c46.657,79.451) 46.657,79.474 R409.1@44.458,79.474 C405.1@46.403,79.468
  Bottom Layer w0.254: v1(67.9,79.62) cw(c67.393,79.113) 68.11,79.113 68.11,49.34 ccw(c71.176,49.34) 69.008,47.172 69.62,46.56 ccw(c71.238,48.178) 71.238,45.89 v1(72.38,45.89) 71.318,45.89 ; v1@72.366,45.718 71.318,45.89 ; v1@72.366,46.062 71.318,45.89
ADCTH: C404.1 R408.1 | length 8.9
  Top Layer w0.3: R408.1@31.654,79.694 33.709,79.694 cw(c33.709,79.602) C404.1@33.774,79.667 32.428,79.694 ; R408.1@31.686,79.401 32.999,79.694 R408.1@31.686,79.987 ; C404.1@33.735,79.375 32.428,79.694 ; C404.1@33.747,79.96 32.428,79.694